# Altium PCB PCB_BrushlessDrive.PcbDoc
Units mm, origin at the board's own origin, x right, y up, seen from the top; angles counter-clockwise.
Board outline 38.28 x 56.75 mm, 4 copper layers (Top Layer, Internal Plane 1, Internal Plane 2, Bottom Layer), stack 0.778 mm thick; 21 components, 20 nets, 117 pads, 23 vias.
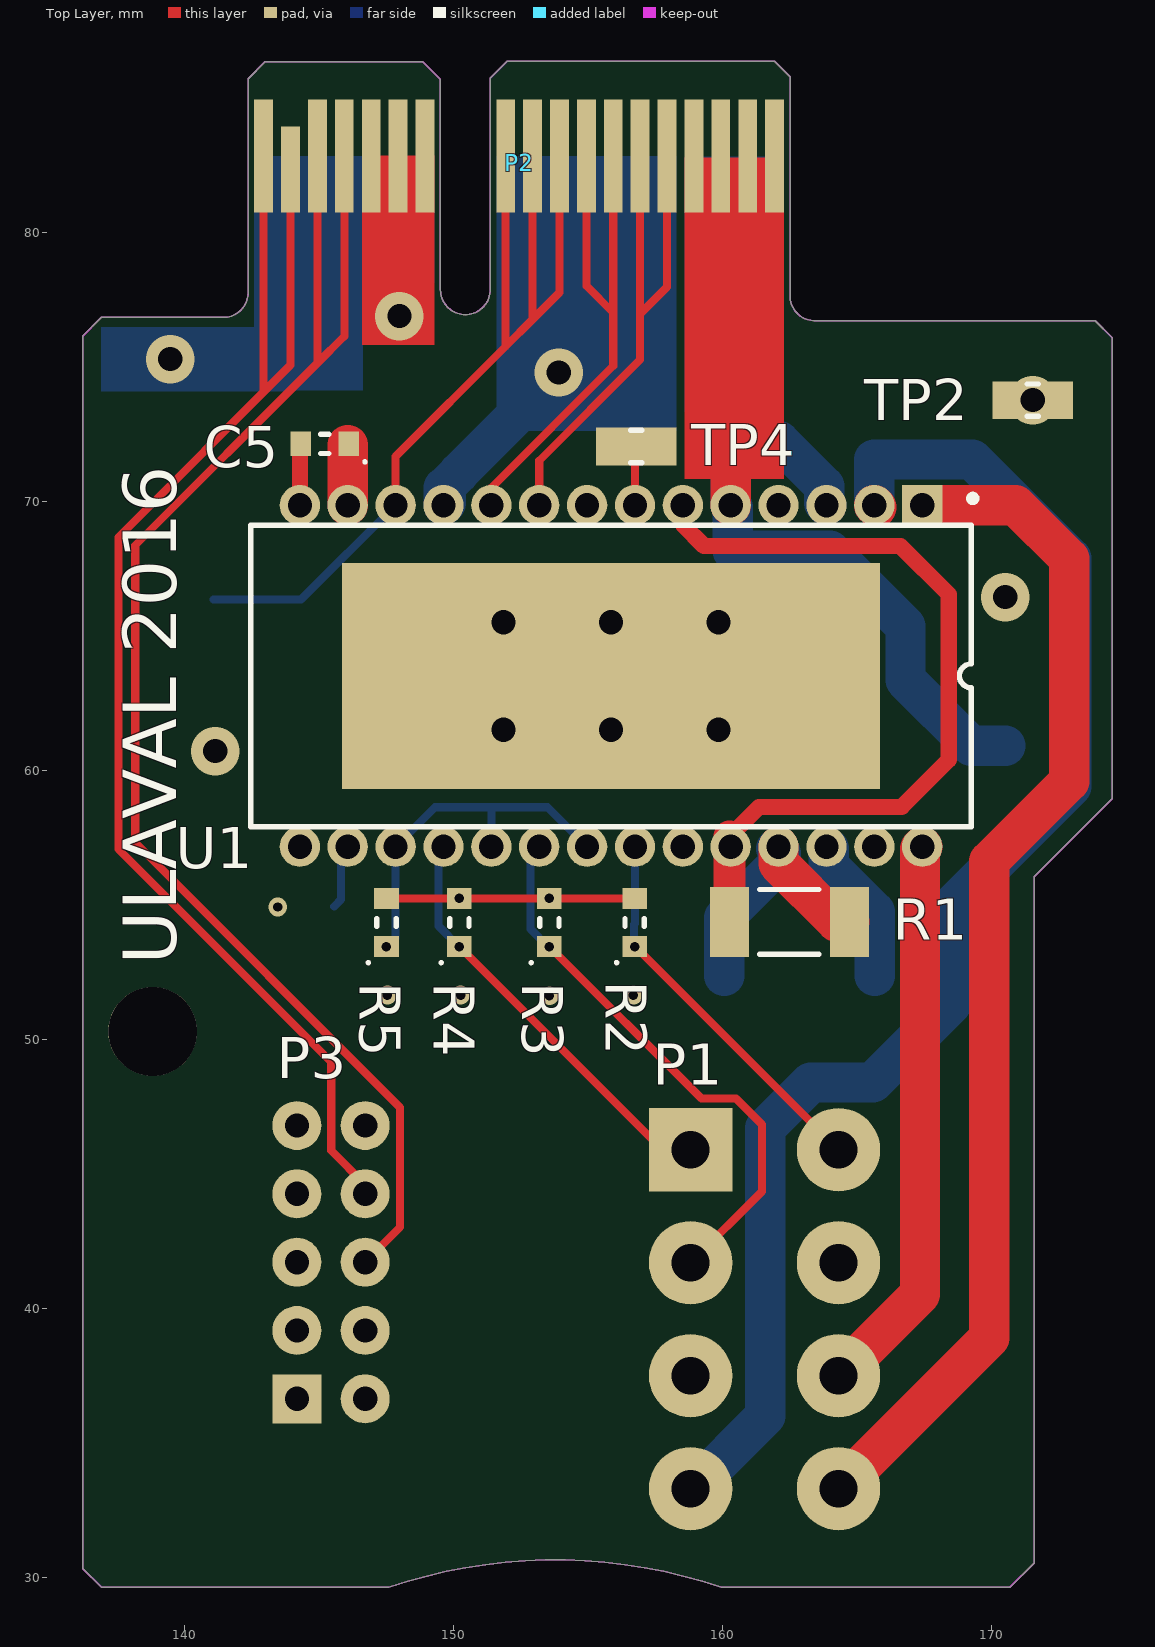
[diagram p0: Top Layer view]
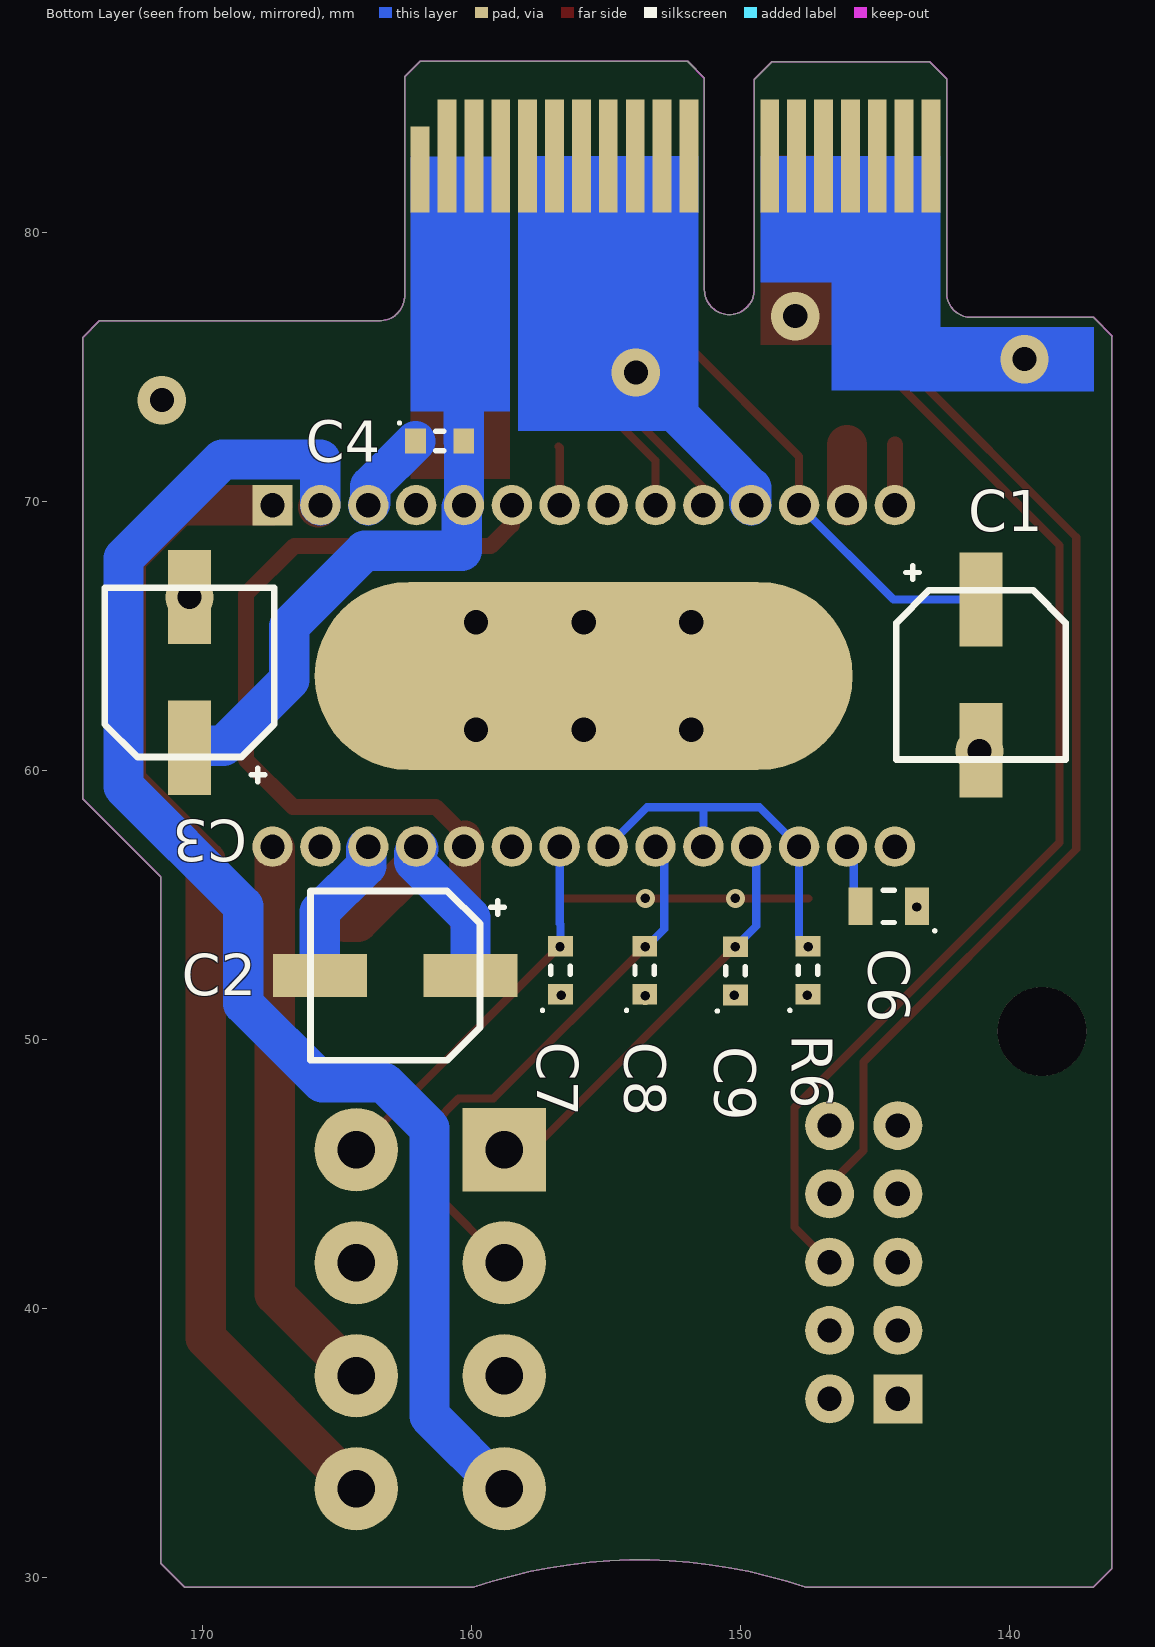
[diagram p1: Bottom Layer view, seen from below]
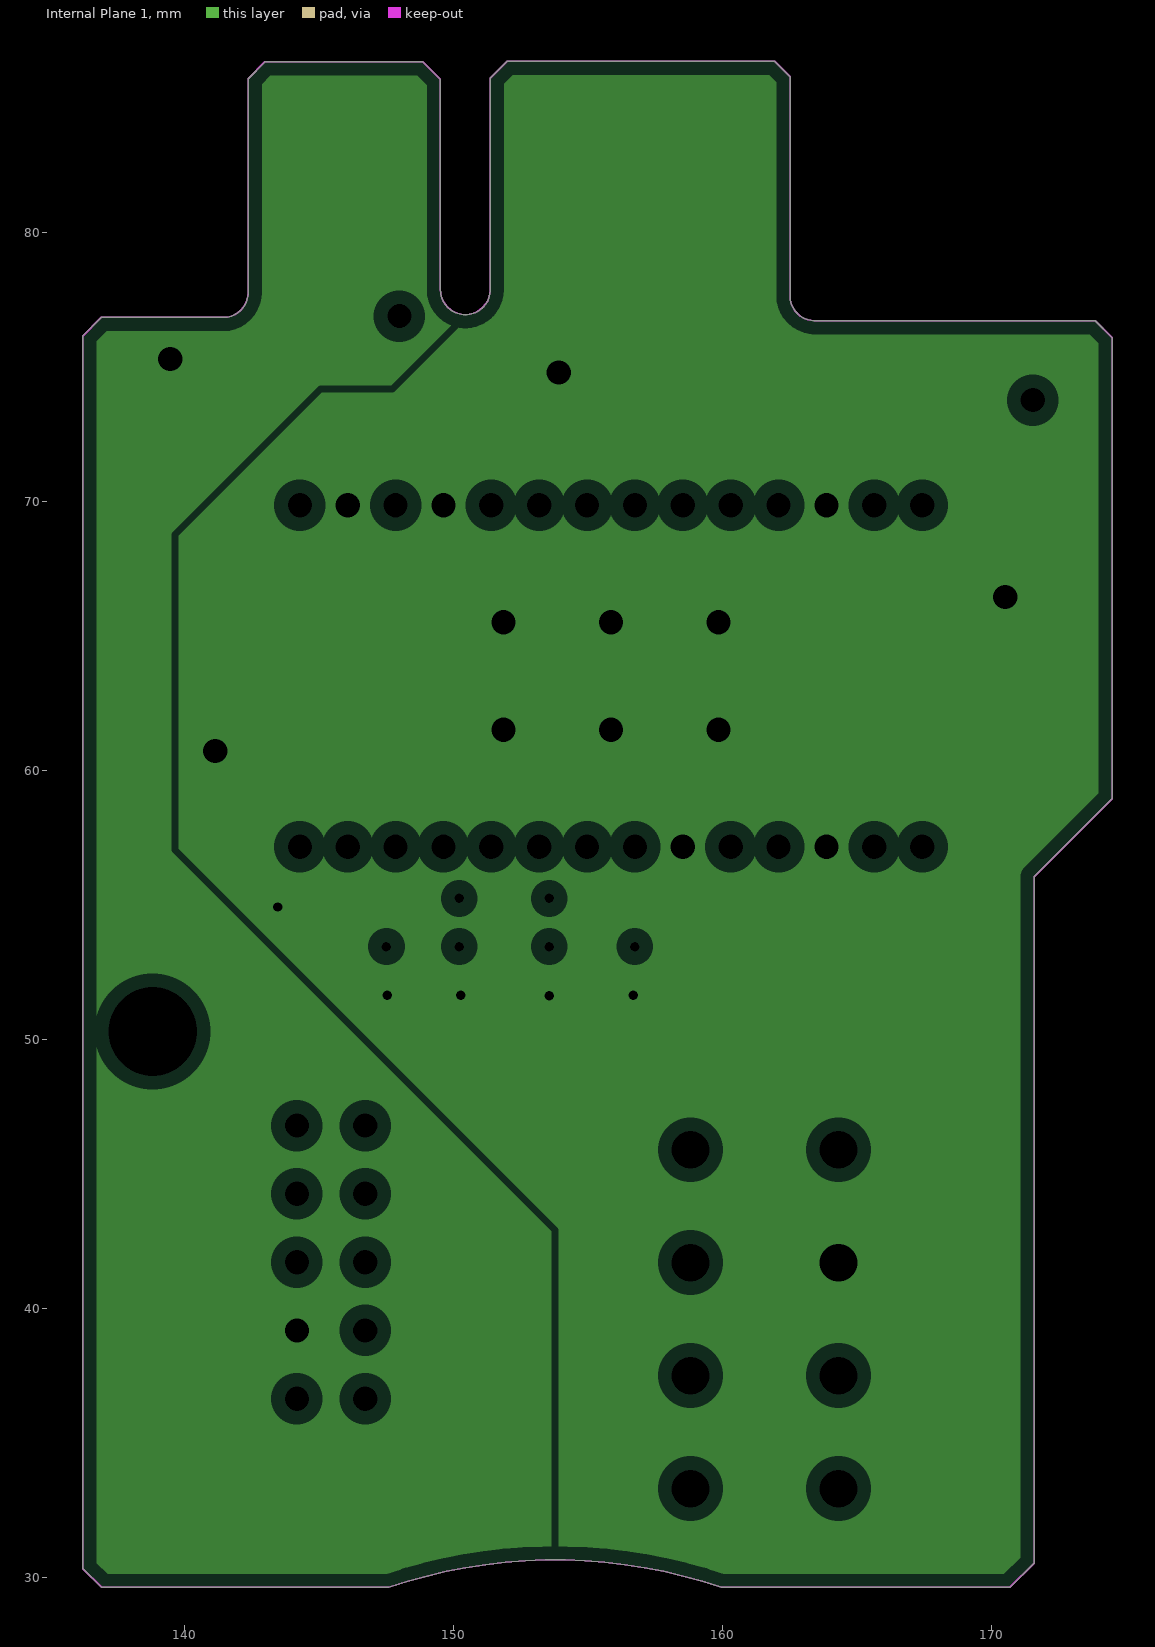
[diagram p2: Internal Plane 1, clearances drawn from the general rule]
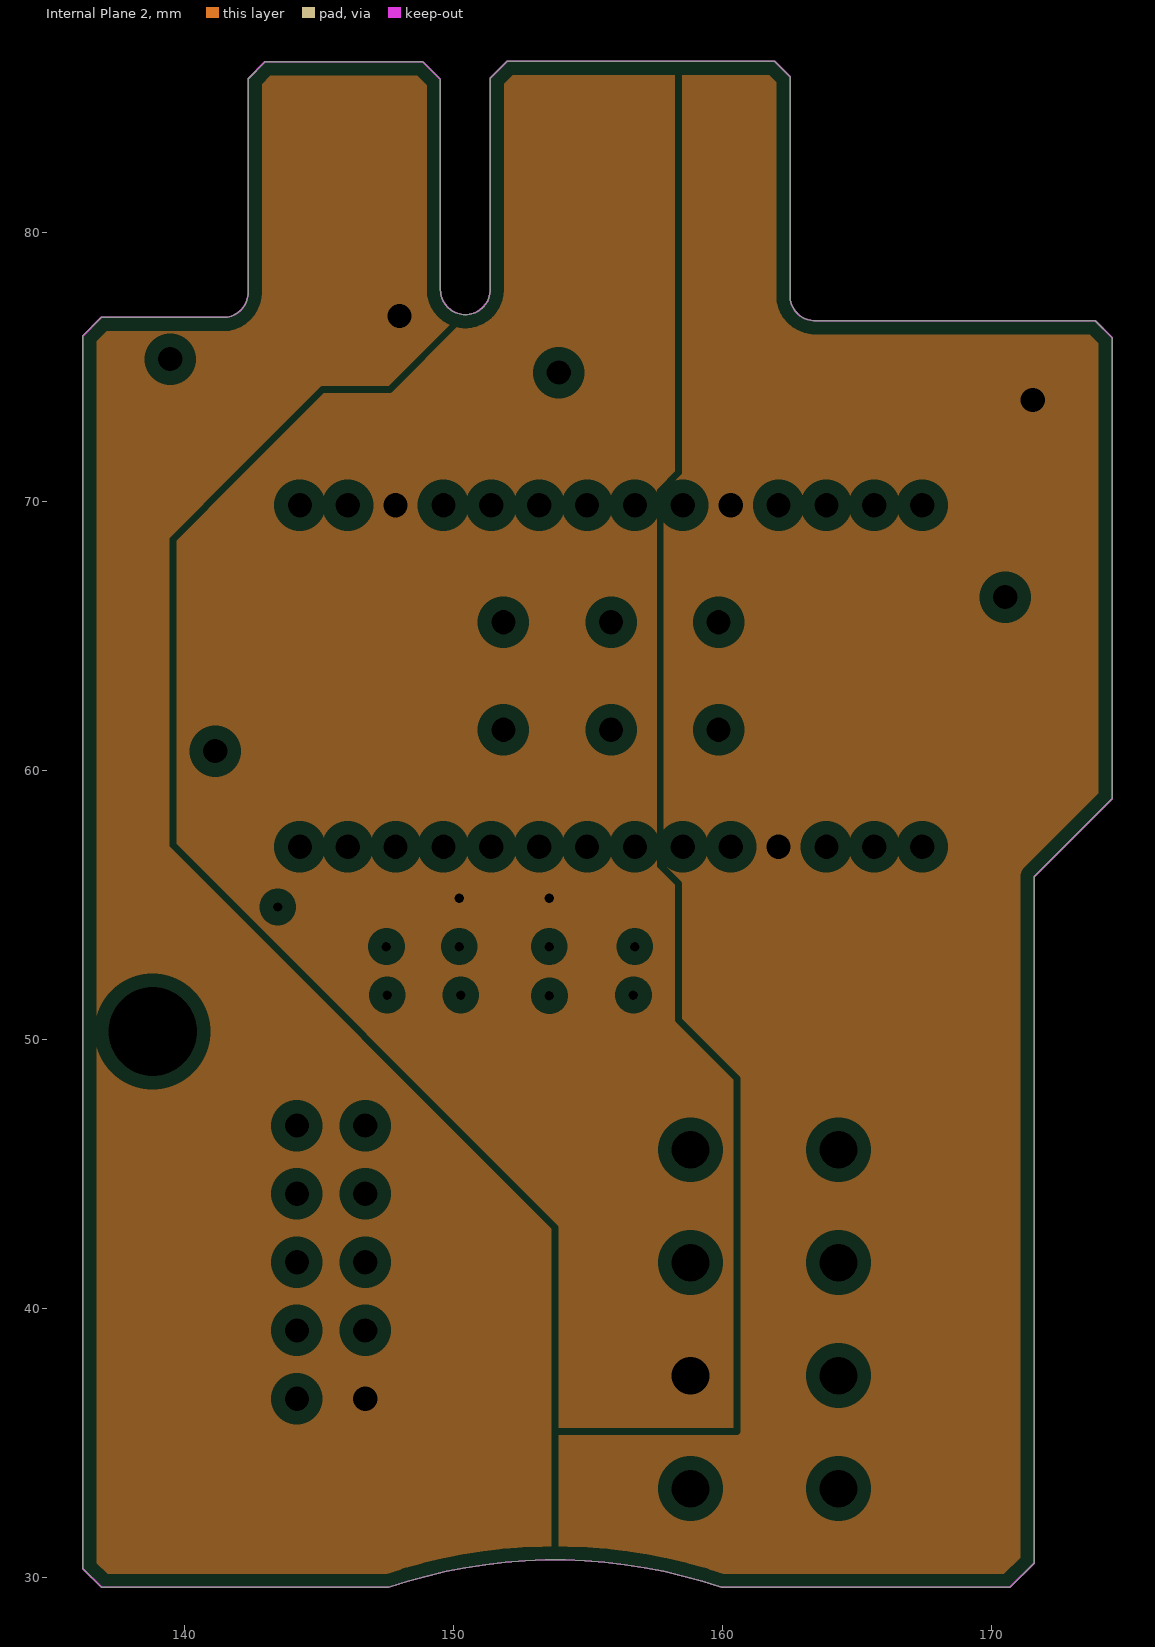
[diagram p3: Internal Plane 2, clearances drawn from the general rule]

## Layer stack, top to bottom
Top Solder: solder mask 0.0102, Solder Resist, Dk 3.5
Top Layer: signal copper 0.0356
Dielectric1: core 0.254, FR-4, Dk 4.2
Internal Plane 1: plane copper 0.036, net PGND
Dielectric 3: prepreg 0.127, Dk 4.2
Internal Plane 2: plane copper 0.036
Dielectric 2: core 0.254, Dk 4.2
Bottom Layer: signal copper 0.0356
Bottom Solder: solder mask 0.0102, Solder Resist, Dk 3.5

## Board outline
136.2,30.325 136.9,29.625 147.575,29.625 cw(c153.763,11.462) 159.95,29.625 170.675,29.625 171.575,30.525 171.575,56.05 174.475,58.95 174.475,76.1 173.85,76.725 163.4,76.725 163.425,76.725 cw(c163.425,77.65) 162.5,77.65 162.5,77.625 162.5,85.8 161.925,86.375 151.975,86.375 151.35,85.75 151.35,77.875 cw(c150.425,77.875) 150.425,76.95 cw(c150.425,77.875) 149.5,77.875 149.5,85.7 148.85,86.35 142.975,86.35 142.35,85.725 142.35,77.775 cw(c141.425,77.775) 141.425,76.85 136.884,76.85 136.192,76.158 136.2,76.15

## Design rules (kind name [scope] priority, off if disabled: settings)
Clearance polygon [InPolygon] p1: gap=0.5
Clearance [All] p2: gap=0.2
PlaneClearance [All] p1: clearance=0.508
PlaneConnect [All] p1: planeconnectstyle=Relief reliefexpansion=0.508 reliefentries=4 reliefconductorwidth=0.5 reliefairgap=0.254
PolygonConnect [All] p1: connectstyle=Relief reliefconductorwidth=0.5 reliefentries=4 polygonreliefangle="90 Angle" airgapwidth=0.254
RoutingVias "RoutingVias Power" [InNet('PGND','DGND','P1','P2','P3')] p1: holewidth=1.6 width=3.2 viastyle="Through Hole" minholewidth=0.9 minwidth=1.8 maxholewidth=1.6 maxwidth=3.2
RoutingVias [All] p2: holewidth=0.6 width=1.2 viastyle="Through Hole" minholewidth=0.35 minwidth=0.7 maxholewidth=0.6 maxwidth=1.2
SolderMaskExpansion [All] p1: expansion=0.102
Width "Power width" [InNet('PGND','VPOWER','P1','P2','P3')] p1: maxlimit=5 minlimit=1.5 preferedwidth=3
Width [All] p2: maxlimit=1.2 minlimit=0.3 preferedwidth=0.6
28 further rules are at their usual default settings.

## Classes and differential pairs
component class Drive: C1 C2 C3 C4 C5 C6 C7 C8 C9 R1 R2 R3 R4 R5 R6 TP2 TP4 U1 U?
component class BrushlessDrive: P1 P2 P3

## Components (designator, comment, footprint, x,y, rotation, side; value= is the part's Value field where it differs from the comment)
C1 "865080645012" "CAP 6.6x6.6mm" 141.068,63.555 r90 bottom
C2 "865080645012" "CAP 6.6x6.6mm" 162.85,52.375 r180 bottom
C3 "865080645012" "CAP 6.6x6.6mm" 170.5,63.65 r270 bottom
C4 "CL10B104KB8SFNC" 0603 161.2,72.25 r180 bottom
C5 "CL10B102KB8NNNC" 0603 145.2,72.15 r180 top
C6 "CL21B105KBFNFNE" 0805 144.5,54.95 r0 bottom
C7 "CL10B472KB8NNNC" 0603 156.7,52.575 r90 bottom
C8 "CL10B472KB8NNNC" 0603 153.575,52.575 r90 bottom
C9 "CL10B472KB8NNNC" 0603 150.2,52.55 r90 bottom
P1 "Header 8" "HallSensor Connector" 158.8,45.9 r0 top
P2 "WM9000-ND (Male)" "Edge connector 36Pos" 161.925,82.85 r180 top
P3 "Header 5X2" "Encoder Connector" 146.7,46.8 r0 top
R1 "CSRN2010FKR250" 2010 162.476,54.375 r0 top
R2 "RC0603JR-0710KL" 0603 156.721,54.35 r90 top
R3 "RC0603JR-0710KL" 0603 153.546,54.35 r90 top
R4 "RC0603JR-0710KL" 0603 150.2,54.35 r90 top
R5 "RC0603JR-0710KL" 0603 147.49,54.35 r90 top
R6 "RC0603JR-0710KL" 0603 147.5,52.575 r90 bottom
TP2 "testpoint" "0805 testpoint" 171.525,73.775 r180 top
TP4 "testpoint" "0805 testpoint" 156.782,72.052 r0 top
U1 "LB11920-E" DIP28 155.842,63.517 r270 top

## Footprints (in the part's own frame and the unit in brackets; to place one, negate y for a bottom-side part, rotate by r counter-clockwise, add the part's x,y. Pads: shape width x height; smd on the part's side, far side on the other; paste and mask are expansions set on the pad)
0603 [mm] "Chip 2-Leads, Body 1,60x0,80mm, IPC Medium Density"
  rect 0.77x0.92 smd: 1(-0.895,0) 2(0.895,0)
  silkscreen extent -1.54,-0.36 0.15,0.72, body extent -0.8,-0.4 0.8,0.4, height 1
0805 [mm] "Chip Capacitor, 2-Leads, Body 2,00x1,25mm, IPC Medium Density"
  rect 0.9x1.4 smd: 1(-1.05,0) 2(1.05,0)
  silkscreen extent -1.76,-0.6 0.2,0.96, body extent -1,-0.63 1,0.63, height 0.8
"0805 testpoint" [mm] "Chip Capacitor, 2-Leads, Body 2,00x1,25mm, IPC Medium Density"
  rect 3x1.4 smd: 1(0,0)
  silkscreen extent -0.2,-0.6 0.2,0.6, body extent -1,-0.63 1,0.63, height 0.8
2010 [mm] "Chip Resistor, 2-Leads, Body 5,00x2,45mm, IPC Medium Density"
  rect 1.45x2.6 smd: 1(-2.225,0) 2(2.225,0)
  silkscreen extent -1.1,-1.2 1.1,1.2, body extent -2.6,-1.3 2.6,1.3, height 0.6
"CAP 6.6x6.6mm" [mm] "Chip"
  rect 3.5x1.6 smd: 1(2.8,0) 2(-2.8,0)
  silkscreen extent -3.15,-3.15 4.06,3.15, body extent -3.15,-3.15 3.15,3.15, height 7.7
DIP28 [mm]
  rect 1.5x1.5 hole 0.9: 1(-6.35,11.57)
  round 1.5 hole 0.9: 2(-6.35,9.79) 3(-6.35,8.01) 4(-6.35,6.23) 5(-6.35,4.45) 6(-6.35,2.67) 7(-6.35,0.89) 8(-6.35,-0.89) 9(-6.35,-2.67) 10(-6.35,-4.45) 11(-6.35,-6.23) 12(-6.35,-8.01) 13(-6.35,-9.79) 14(-6.35,-11.57) 15(6.35,-11.57) 16(6.35,-9.79) 17(6.35,-8.01) 18(6.35,-6.23) 19(6.35,-4.45) 20(6.35,-2.67) 21(6.35,-0.89) 22(6.35,0.89) 23(6.35,2.67) 24(6.35,4.45) 25(6.35,6.23) 26(6.35,8.01) 27(6.35,9.79) 28(6.35,11.57)
  rect 8.4x20 smd: 29(0,0)
  rrect100% 7x20 smd far side: 29(0,0)
  silkscreen extent -6.72,-13.4 5.6,13.58, body extent -5.53,-13.4 5.63,13.4, height 4
"Edge connector 36Pos" [mm] "PCI Express 36Pos 1MM gold"
  rect 0.7x3.2 smd far side: A1(0,0.5)
  rect 0.7x4.2 smd far side: A2(1,0) A3(2,0) A4(3,0) A5(4,0) A6(5,0) A7(6,0) A8(7,0) A9(8,0) A10(9,0) A11(10,0) A12(13,0) A13(14,0) A14(15,0) A15(16,0) A16(17,0) A17(18,0) A18(19,0)
  rect 0.7x4.2 smd: B1(0,0) B2(1,0) B3(2,0) B4(3,0) B5(4,0) B6(5,0) B7(6,0) B8(7,0) B9(8,0) B10(9,0) B11(10,0) B12(13,0) B13(14,0) B14(15,0) B15(16,0) B16(17,0) B18(19,0)
  rect 0.7x3.2 smd: B17(18,0.5)
"Encoder Connector" [mm] "Connector; Header; 5x2 Position"
  rect 1.82x1.82 hole 0.9: 1(-2.54,-10.16)
  round 1.82 hole 0.9: 2(0,-10.16) 3(-2.54,-7.62) 4(0,-7.62) 5(-2.54,-5.08) 6(0,-5.08) 7(-2.54,-2.54) 8(0,-2.54) 9(-2.54,0) 10(0,0)
"HallSensor Connector" [mm] "Connector; Header; 8 Position"
  rect 3.1x3.1 hole 1.4: 1(0,0)
  round 3.1 hole 1.4: 2(0,-4.2) 3(0,-8.4) 4(0,-12.6) 5(5.5,0) 6(5.5,-4.2) 7(5.5,-8.4) 8(5.5,-12.6)

## Part data
C1 C2 C3: "CAP 47 UF 20% 50 V"
C4: "CAP CER 0.1UF 50V X7R 0603"
C5: "CAP CER 1000PF 50V X7R 0603"
C6: "CAP CER 1UF 50V X7R 0805"
C7 C8 C9: "CAP CER 4700PF 50V X7R 0603"
P1: "Header, 8-Pin"
P3: "Header, 5-Pin, Dual row"
R1: "RES SMD 0.25 OHM 1% 1W 2010"
R2 R3 R4 R5 R6: "RES SMD 10K OHM 5% 1/10W 0603"
TP2 TP4: "Testpoint"
U1: "IC MOTOR DRIVER PAR 28HDIP"

## Free pads (board coordinates)
  round 3.3 hole 3.3: 1(138.8,50.3)

## Via types
v1: diameter 0.7, hole 0.35, Top Layer to Bottom Layer, 11 vias
v2: diameter 1.5, hole 0.9, Top Layer to Bottom Layer, 6 vias
v3: diameter 1.8, hole 0.9, Top Layer to Bottom Layer, 6 vias

## Nets (pads, with @x,y where several pads share a name; then routed paths per layer and width w, separated by ;. In a path a pad name is that pad's centre, name@x,y a point inside that pad or via, vN(x,y) a via of type N, cw(c..) or ccw(c..) an arc to the next point about the centre after c; other vN are vias at no path point)
5VA: C1.1 P1.3 P2.B9 P2.B10 P2.B11 R2.2 R3.2 R4.2 R5.2 U1.12 | length 46.5
  Top Layer w0.3: R5.2 v1(150.2,55.245) v1(153.546,55.245) R2.2 ; U1.12@148.125,70.16 U1.12 147.832,71.682 151.925,75.775 ; P2.B11 151.925,75.775 ; P2.B10 152.925,76.775 ; P2.B9 153.925,77.775 152.925,76.775 ; 151.925,75.775 152.925,76.775
  Bottom Layer w0.3: C1.1 144.32,66.355 U1.12
5VD: P2.B12 P2.B13 P2.B14 P3.2
  other v3: 147.975,76.9
A: P2.B15 P2.B16 P3.6 | length 56.7
  Top Layer w0.3: P2.B16 144.925,75.15 ; P2.B15 145.925,76.15 144.925,75.15 ; P3.6 148,43.02 148,47.475 138.15,57.325 138.15,68.375 144.925,75.15
B: P2.B17 P2.B18 P3.8 | length 53.3
  Top Layer w0.3: 142.925,74.075 P2.B18 ; P2.B17 143.925,75.075 137.525,68.675 137.525,57.075 145.44,49.16 145.44,45.868 146.7,44.608 P3.8
CTRL: P2.B5 P2.B6 U1.9 | length 20.9
  Top Layer w0.3: U1.9@153.125,69.914 U1.9 153.172,71.522 156.925,75.275 156.925,76.975 ; P2.B6 156.925,76.975 ; P2.B5 157.925,77.975 156.925,76.975
DGND: P2.A12 P2.A13 P2.A14 P2.A15 P2.A16 P2.A17 P2.A18 P3.3
  other v3: 139.45,75.3
DIR: P2.B7 P2.B8 U1.10 | length 21.5
  Top Layer w0.3: U1.10@151.125,70.134 U1.10 151.392,70.517 155.925,75.05 155.925,77.025 ; P2.B8 154.925,78.025 155.925,77.025 ; P2.B7 155.925,77.025
H1: C9.2 P1.1 R4.1 U1.18 | length 15.8
  Top Layer w0.3: v1(150.2,53.455) 157.755,45.9 P1.1
  Bottom Layer w0.3: U1.18 149.425,56.98 149.425,54.225 C9.2@150.2,53.45
H2: C8.2 P1.2 R3.1 U1.20 | length 21
  Top Layer w0.3: v1(153.546,53.455) 159.201,47.8 160.495,47.8 161.45,46.845 161.45,44.35 P1.2
  Bottom Layer w0.3: U1.20 152.846,56.842 152.846,54.104 C8.2@153.5,53.45
H3: C7.2 P1.5 R2.1 U1.22 | length 14.4
  Top Layer w0.3: v1(156.721,53.455) 156.745,53.455 P1.5
  Bottom Layer w0.3: C7.2@156.7,53.45 C7.2 156.7,54.276 156.732,54.308 U1.22
NetC5_2: C5.2 U1.14 | length 2.2
  Top Layer w0.6: U1.14 C5.2@144.272,72.117
NetC6_2: C6.2 U1.16 | length 2.4
  Bottom Layer w0.3: C6.2 145.8,55.2 145.8,56.915 U1.16
NetR5_1: R5.1 R6.2 U1.17 U1.19 U1.21 | length 13.7
  Bottom Layer w0.3: R6.2@147.5,53.445 147.832,53.777 U1.17 149.3,58.635 153.484,58.635 U1.21 ; U1.19 151.392,58.635
  other v1: 147.49,53.455
NetTP4_1: TP4.1 U1.7 | length 2.2
  Top Layer w0.3: U1.7 156.732,72.002 TP4.1
P1: P1.7 U1.28 | length 21
  Top Layer w1.5: P1.7 167.332,40.532 167.332,57.087 U1.28
P2: P1.8 U1.1 | length 44.4
  Top Layer w1.5: P1.8 169.9,38.9 169.9,56.625 172.875,59.6 172.875,67.875 170.883,69.867 U1.1
P3: P1.4 U1.2 | length 52.5
  Top Layer w1.5: U1.2 U1.2@165.712,69.787
  Bottom Layer w1.5: P1.4 158.875,33.3 161.575,36 161.575,46.711 163.264,48.4 165.568,48.4 168.5,51.332 168.5,54.957 172.95,59.407 172.95,67.894 169.276,71.567 165.632,71.567 U1.2
PGND: C1.2 C2.2 C3.2 C4.1 C5.1 C6.1 C7.1 C8.1 C9.1 P1.6 P2.A5 P2.A6 P2.A7 P2.A8 P2.A9 P2.A10 P2.A11 R6.1 U1.3 U1.11 U1.13 U1.23 U1.26 U1.29 | length 19.6
  Top Layer w1.5: U1.13 C5.1@146.052,72.107
  Bottom Layer w1.5: U1.11@149.612,70.513 U1.11 149.692,69.947 149.692,70.571 150.177,71.057 150.177,71.077 153.412,74.312 153.412,76.488 ; C4.1 163.772,70.573 163.772,69.947 U1.3 ; U1.26@163.932,57.087 163.932,56.463 165.65,54.745 C2.2
  other v1: 153.55,51.625 147.525,51.65 150.25,51.65 156.675,51.65 143.45,54.925
  other v2: 151.842,61.517 155.842,61.517 159.842,61.517 151.842,65.517 155.842,65.517 159.842,65.517
  other v3: 141.125,60.725 170.5,66.45 153.9,74.8
RF: R1.1 U1.6 U1.24 | length 30.3
  Top Layer w0.6: U1.6 158.512,69.138 159.3,68.35 166.6,68.35 168.4,66.55 168.4,60.4 166.65,58.65 161.35,58.65 U1.24@160.251,57.551
  Top Layer w1.2: R1.1 U1.24@160.251,57.551
VPOWER: C2.1 C3.1 C4.2 P2.A1 P2.A2 P2.A3 P2.A4 P2.B1 P2.B2 P2.B3 P2.B4 R1.2 TP2.1 U1.5 U1.25 | length 36.7
  Top Layer w1.5: U1.5 160.292,76.042 160.35,76.1 ; U1.25 162.072,56.543 164.24,54.375 R1.2
  Bottom Layer w1.5: C2.1 160.05,54.521 162.152,56.623 162.152,56.927 U1.25@161.992,57.087 ; 160.305,74.455 C4.2 160.292,72.237 U1.5 160.372,69.787 160.372,68.167 163.985,68.167 166.792,65.36 166.792,63.367 169.234,60.925 C3.1@170.5,60.925
  other v3: 171.525,73.775
pads on no net: P3.1 P3.4 P3.5 P3.7 P3.9 P3.10 U1.4 U1.8 U1.15 U1.27

## Polygon pours and split planes (outlines as drawn)
PGND on Internal Plane 1 (split plane): 161.99,85.589 161.99,77.625 161.993,77.587 161.999,77.489 162.026,77.331 162.07,77.176 162.132,77.027 162.21,76.886 162.303,76.755 162.41,76.635 162.53,76.528 162.661,76.435 162.802,76.357 162.951,76.295 163.106,76.251 163.264,76.224 163.362,76.218 163.4,76.215 163.425,76.215 173.639,76.215 173.965,75.889 173.965,59.161 171.214,56.411 171.151,56.334 171.103,56.245 171.074,56.15 171.065,56.05 171.065,30.736 170.464,30.135 160.027,30.135 159.85,30.196 159.258,30.378 158.661,30.542 158.06,30.686 157.454,30.812 156.844,30.918 156.231,31.005 155.616,31.073 154.999,31.122 154.381,31.151 153.892,31.158 153.892,42.912 153.882,42.962 153.854,43.004 139.754,57.104 139.754,68.721 142.198,71.165 145.097,74.064 147.718,74.064 147.768,74.074 147.81,74.102 150.172,76.464 150.264,76.449 150.42,76.44 150.425,76.44 150.43,76.44 150.586,76.449 150.744,76.476 150.899,76.52 151.048,76.582 151.189,76.66 151.32,76.753 151.44,76.86 151.547,76.98 151.64,77.111 151.718,77.252 151.78,77.401 151.824,77.556 151.851,77.714 151.86,77.87 151.86,77.875 151.86,85.539 152.186,85.865 161.714,85.865
DGND on Internal Plane 1 (split plane): 148.99,85.489 148.99,77.875 148.99,77.87 148.999,77.714 149.026,77.556 149.07,77.401 149.132,77.252 149.21,77.111 149.303,76.98 149.41,76.86 149.53,76.753 149.661,76.66 149.802,76.582 149.888,76.546 147.665,74.323 145.043,74.323 144.994,74.313 144.952,74.285 142.015,71.348 139.533,68.867 139.505,68.825 139.496,68.775 139.496,57.05 139.505,57 139.533,56.958 153.633,42.859 153.633,31.158 153.144,31.151 152.526,31.122 151.909,31.073 151.294,31.005 150.681,30.918 150.071,30.812 149.465,30.686 148.864,30.542 148.267,30.378 147.675,30.196 147.498,30.135 137.111,30.135 136.71,30.536 136.71,75.955 137.095,76.34 141.425,76.34 141.43,76.34 141.586,76.349 141.744,76.376 141.899,76.42 142.048,76.482 142.189,76.56 142.32,76.653 142.44,76.76 142.547,76.88 142.64,77.011 142.718,77.152 142.78,77.301 142.824,77.456 142.851,77.614 142.86,77.77 142.86,77.775 142.86,85.514 143.186,85.84 148.639,85.84
5VA on Internal Plane 2 (split plane): 158.221,71.129 157.583,70.492 157.555,70.45 157.546,70.4 157.546,56.475 157.555,56.425 157.583,56.383 158.221,55.746 158.221,50.725 158.23,50.675 158.258,50.633 160.396,48.496 160.396,35.554 153.892,35.554 153.892,43.012 153.882,43.062 153.854,43.104 139.679,57.279 139.679,68.546 142.106,70.973 145.172,74.039 147.618,74.039 147.668,74.048 147.71,74.076 150.108,76.475 150.264,76.449 150.42,76.44 150.425,76.44 150.43,76.44 150.586,76.449 150.744,76.476 150.899,76.52 151.048,76.582 151.189,76.66 151.32,76.753 151.44,76.86 151.547,76.98 151.64,77.111 151.718,77.252 151.78,77.401 151.824,77.556 151.851,77.714 151.86,77.87 151.86,77.875 151.86,85.539 152.186,85.865 158.221,85.865
VPOWER on Internal Plane 2 (split plane): 161.99,85.589 161.99,77.625 161.993,77.587 161.999,77.489 162.026,77.331 162.07,77.176 162.132,77.027 162.21,76.886 162.303,76.755 162.41,76.635 162.53,76.528 162.661,76.435 162.802,76.357 162.951,76.295 163.106,76.251 163.264,76.224 163.362,76.218 163.4,76.215 163.425,76.215 173.639,76.215 173.965,75.889 173.965,59.161 171.214,56.411 171.151,56.334 171.103,56.245 171.074,56.15 171.065,56.05 171.065,30.736 170.464,30.135 160.027,30.135 159.85,30.196 159.258,30.378 158.661,30.542 158.06,30.686 157.454,30.812 156.844,30.918 156.231,31.005 155.616,31.073 154.999,31.122 154.381,31.151 153.892,31.158 153.892,35.296 160.525,35.296 160.575,35.305 160.617,35.333 160.645,35.375 160.654,35.425 160.654,48.55 160.645,48.6 160.617,48.642 158.479,50.779 158.479,55.8 158.47,55.85 158.442,55.892 157.804,56.529 157.804,70.346 158.442,70.983 158.47,71.025 158.479,71.075 158.479,85.865 161.714,85.865
5VD on Internal Plane 2 (split plane): 148.99,85.489 148.99,77.875 148.99,77.87 148.999,77.714 149.026,77.556 149.07,77.401 149.132,77.252 149.21,77.111 149.303,76.98 149.41,76.86 149.53,76.753 149.661,76.66 149.802,76.582 149.835,76.568 147.564,74.298 145.118,74.298 145.068,74.288 145.026,74.26 141.923,71.156 139.458,68.692 139.43,68.65 139.421,68.6 139.421,57.225 139.43,57.175 139.458,57.133 153.633,42.959 153.633,31.158 153.144,31.151 152.526,31.122 151.909,31.073 151.294,31.005 150.681,30.918 150.071,30.812 149.465,30.686 148.864,30.542 148.267,30.378 147.675,30.196 147.498,30.135 137.111,30.135 136.71,30.536 136.71,75.955 137.095,76.34 141.425,76.34 141.43,76.34 141.586,76.349 141.744,76.376 141.899,76.42 142.048,76.482 142.189,76.56 142.32,76.653 142.44,76.76 142.547,76.88 142.64,77.011 142.718,77.152 142.78,77.301 142.824,77.456 142.851,77.614 142.86,77.77 142.86,77.775 142.86,85.514 143.186,85.84 148.639,85.84

## Keep-outs
Keep-Out Layer:
  lines w0.05: 136.192,76.158 136.884,76.85 141.425,76.85 ccw(c141.425,77.775) 142.35,77.775 142.35,85.725 142.975,86.35 148.85,86.35 149.5,85.7 149.5,78.425 149.5,77.9 149.5,77.875 ccw(c150.425,77.875) 150.425,76.95 ccw(c150.425,77.875) 151.35,77.875 151.35,85.75 151.975,86.375 161.925,86.375 162.5,85.8 162.5,77.625 ; 136.2,76.15 136.2,30.325 136.9,29.625 147.575,29.625 cw(c153.763,11.462) 159.95,29.625 170.675,29.625 171.575,30.525 171.575,56.05 174.475,58.95 174.475,71.525 174.475,73.85 174.475,76.1 173.85,76.725 163.4,76.725 ; 162.5,77.65 ccw(c163.425,77.65) 163.425,76.725

## Other copper
Top Layer:
  rectangle net 5VD: 146.575,75.825 149.275,82.875
  rectangle net VPOWER: 158.575,70.85 162.275,82.8
Bottom Layer:
  rectangle net VPOWER: 158.575,73.35 162.275,82.825
  rectangle net PGND: 151.575,72.625 158.275,82.85
  rectangle net DGND: 142.575,78.15 149.275,82.85
  rectangle net DGND: 142.575,74.125 146.625,78.15
  rectangle net DGND: 136.875,74.1 143.7,76.5
Internal Plane 1 (plane layer: these items are gaps in the copper):
  lines w0.254: 150.2,76.675 147.718,74.193 145.043,74.193 142.106,71.256 139.625,68.775 139.625,57.05 153.763,42.912 153.763,30.637
Internal Plane 2 (plane layer: these items are gaps in the copper):
  lines w0.254: 150.082,76.632 147.618,74.168 145.118,74.168 142.014,71.064 139.55,68.6 139.55,57.225 153.763,43.012 153.763,30.937 ; 153.763,35.425 160.525,35.425 160.525,48.55 158.35,50.725 158.35,55.8 157.675,56.475 157.675,70.4 158.35,71.075 158.35,86.4

## Silkscreen, mask and mechanical layers (free items; w line width, h text height)
Top Overlay:
  text "ULAVAL 2016" at 139.675,52.775 h2 r90